# Altium PCB LMV324对射接收板_20260912.PcbDoc
Units mil, origin at the board's own origin, x right, y up, seen from the top; angles counter-clockwise.
Board outline 358.27 x 1118.11 mil, 2 copper layers (Top, Bottom), stack 12.7 mil thick; 60 components, 35 nets, 153 pads, 63 vias.
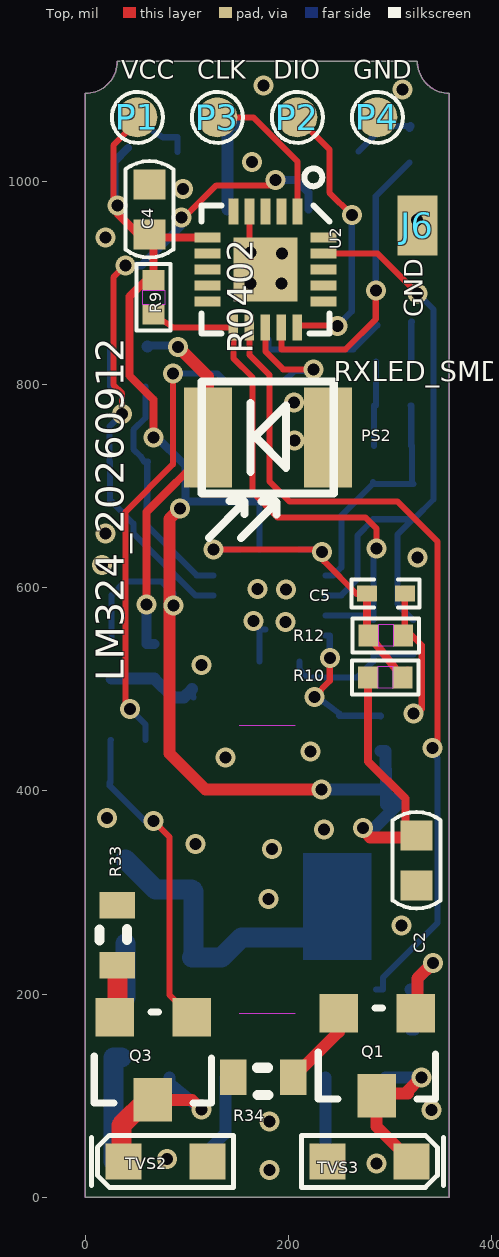
[diagram p0: Top view]
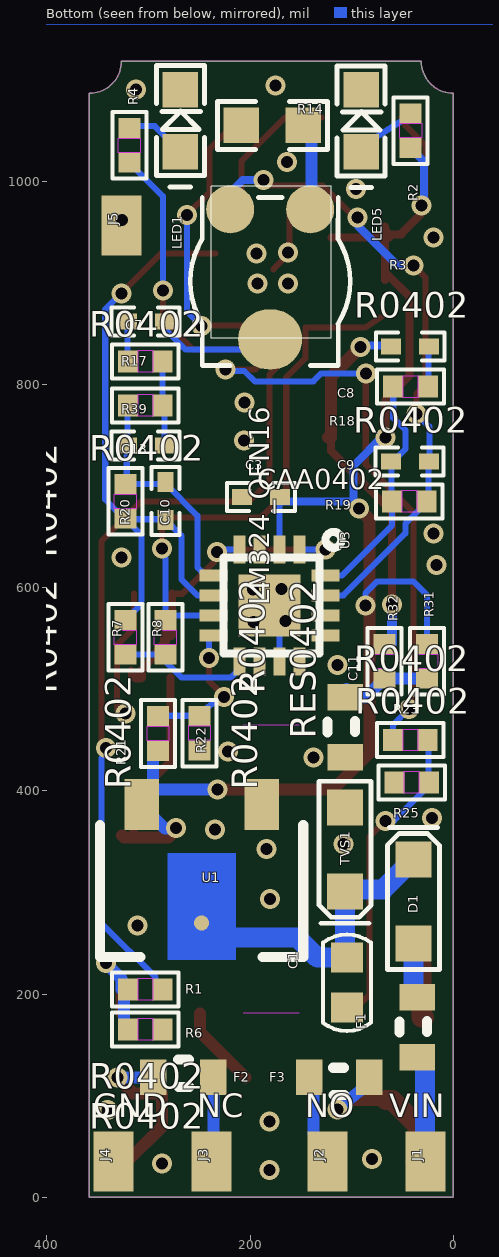
[diagram p1: Bottom view, seen from below]

## Layer stack, top to bottom
Solder Mask Top: solder mask 0.4, Solder Resist, Dk 3.5
Top: signal copper 1.35
Dielectric 1: dielectric 10, FR-4, Dk 4.3
Bottom: signal copper 1.35
Solder Mask Bottom: solder mask 0.4, Solder Resist, Dk 3.5

## Board outline
358.27,0 0,0 0,1086.61 ccw(c0,1118.11) 31.5,1118.11 326.77,1118.11 ccw(c358.27,1118.11) 358.27,1086.61

## Design rules (kind name [scope] priority, off if disabled: settings)
Clearance "Clearance - Default - DEFAULT- SMD" [IsVia vs IsSMTPin] p1: gap=6 ignorepadtopadclearanceinfootprint=FALSE
Clearance "Clearance - Default - DEFAULT - Via" [IsVia vs IsVia] p2: gap=6 ignorepadtopadclearanceinfootprint=FALSE
Clearance "Clearance - Default - DEFAULT - Net" [All] p3: gap=6 ignorepadtopadclearanceinfootprint=FALSE except(0: Arc-Hole Track-Hole SMDPad-Hole THPad-Hole Via-Hole Fill-Hole Poly-Hole Region-Hole Text-Hole; 10: Text-Text)
ComponentClearance "ComponentClearance - Default - DEFAULT" [All] p1: gap=6 collisioncheckmode=3 verticalgap=10 showdistances=FALSE
FanoutControl Fanout_Small [(CompPinCount < 5)] p3: bgadir=Out bgaviamode=Centered fanoutstyle=Auto fanoutdirection=OutThenIn viagrid=1 // Fanout_Small (Default Rule)
FanoutControl Fanout_SOIC [IsSOIC] p4: bgadir=Out bgaviamode=Centered fanoutstyle=Auto fanoutdirection=Alternating viagrid=1 // Fanout_SOIC (Default Rule)
HoleToHoleClearance "HoleToHoleClearance - Default - DEFAULT" [All] p1: gap=6 allowstackedmicrovias=TRUE
Length "Default Length" [All] p1: maxlimit=50000 minlimit=0
MaxMinImpedance "Default Impedance" [All] p1: minimum=50.00 maximum=150.0
ParallelSegment "Default Parallel Segment Adjasent" [All] p1: limit=1000 gap=200
ParallelSegment "Default Parallel Segment Same Layer" [All] p2: limit=1000 gap=200
PlaneConnect "Default PlaneConnect" [All] p1: planeconnectstyle=Direct reliefexpansion=20 reliefentries=4 reliefconductorwidth=15 reliefairgap=10
PolygonConnect "PolygonConnect - Default SMT" [IsSMTPin] p1: connectstyle=Direct reliefconductorwidth=10 reliefentries=4 polygonreliefangle="45 Angle" airgapwidth=10
PolygonConnect "PolygonConnect - Default Pad" [All] p2: connectstyle=Direct reliefconductorwidth=15 reliefentries=4 polygonreliefangle="45 Angle" airgapwidth=10
RoutingLayers "RoutingLayers - Default - DEFAULT" [All] p1: top layer_v5=TRUE bottom layer_v5=TRUE
RoutingPriority "RoutingPriority - Default - DEFAULT" [All] p1: routingpriority=3
RoutingTopology "Default Routing Topology" [All] p1: topology=Shortest
RoutingVias "RoutingVias - Default - DEFAULT" [All] p1: holewidth=11.81 width=19.68 viastyle="Through Hole" minholewidth=11.81 minwidth=19.68 maxholewidth=11.81 maxwidth=19.68
SMDToCorner "SMDToCorner - Default - DEFAULT" [All] p1: distance=60000
SolderMaskExpansion [All] p1: expansion=4 istentingtop=FALSE
Width "Default Width" [All] p1: maxlimit=6 minlimit=6 preferedwidth=6
22 further rules are at their usual default settings.

## Components (designator, comment, footprint, x,y, rotation, side; value= is the part's Value field where it differs from the comment)
C1 "C0603" C0603 104.74,211.26 r270 bottom
C2 "C0603" C0603 326.03,331.75 r270 top
C3 "CAA0402" CAA0402 153.54,704.72 r0 bottom
C4 "C0603" C0603 62.99,972.44 r270 top
C5 "CAA0402" CAA0402 259.84,578.74 r0 top
C7 "CC0402" CC0402 338.58,846.46 r180 bottom
C8 "CC0402" CC0402 6.74,853.05 r0 bottom
C9 "CC0402" CC0402 78.74,708.66 r180 bottom
C10 "CC0402" CC0402 267.72,649.61 r90 bottom
C11 "0603" 0603 106.3,433.07 r0 bottom
C13 "CC0402" CC0402 338.58,724.41 r180 bottom
D1 "WSOD-323" WSOD-323 39.37,291.34 r270 bottom
F1 "0603" 0603 35.43,137.8 r0 bottom
F2 "0603" 0603 295.28,118.11 r90 bottom
F3 "0603" 0603 82.68,118.11 r270 bottom
J1 "FPAD_3C" FPAD_3C 27.56,35.43 r90 bottom
J2 "FPAD_3C" FPAD_3C 124.02,35.43 r90 bottom
J3 "FPAD_3C" FPAD_3C 238.19,35.43 r90 bottom
J4 "FPAD_3C" FPAD_3C 334.65,35.43 r90 bottom
J5 "FPAD_3C" FPAD_3C 326.77,956.69 r90 bottom
J6 "FPAD_3C" FPAD_3C 326.77,956.69 r90 top
LED1 "LED0603" LED0603 243.7,1004.33 r90 bottom
LED5 "LED0603" LED0603 65.75,1003.94 r90 bottom
P1 "TEST-POINT_D1.0" TEST-POINT_D1.0 51.18,1062.99 r0 top
P2 "TEST-POINT_D1.0" TEST-POINT_D1.0 208.66,1062.99 r0 top
P3 "TEST-POINT_D1.0" TEST-POINT_D1.0 129.92,1062.99 r0 top
P4 "TEST-POINT_D1.0" TEST-POINT_D1.0 287.4,1062.99 r0 top
PS2 "RXLED_SMD" RXLED_SMD 179.53,748.03 r180 top
Q1 "SOT23$2F$2" SOT23$2F$2 326.77,181.1 r0 top
Q3 "SOT23$2F$2" SOT23$2F$2 106.3,177.17 r0 top
R1 "R0402" R0402 303.15,204.72 r180 bottom
R2 "R0402" R0402 42.1,1050 r90 bottom
R3 "SMD" SMD 180.31,901.57 r0 bottom
R4 "R0402" R0402 318.9,1035.43 r90 bottom
R6 "R0402" R0402 303.15,165.35 r180 bottom
R7 "R0402" R0402 322.83,551.18 r270 bottom
R8 "R0402" R0402 283.46,551.18 r90 bottom
R9 "R0402" R0402 67.24,885.83 r90 top
R10 "R0402" R0402 295.28,511.81 r180 top
R12 "R0402" R0402 295.79,553.17 r0 top
R14 "R0603" R0603 208.66,1055.12 r180 bottom
R17 "R0402" R0402 303.15,822.83 r180 bottom
R18 "R0402" R0402 42.17,797.93 r0 bottom
R19 "R0402" R0402 43.31,685.04 r0 bottom
R20 "R0402" R0402 322.83,685.04 r270 bottom
R21 "R0402" R0402 290.73,456.54 r90 bottom
R22 "R0402" R0402 249.92,457.02 r270 bottom
R23 "R0402" R0402 42.26,450.15 r0 bottom
R25 "R0402" R0402 41.05,408.44 r0 bottom
R31 "RES0402" RES0402 25.88,527.56 r90 bottom
R32 "RES0402" RES0402 67.9,527.56 r270 bottom
R33 "0603" 0603 31.5,228.35 r180 top
R34 "0603" 0603 204.72,118.11 r270 top
R39 "R0402" R0402 303.15,779.53 r0 bottom
TVS1 "SOD-323" SOD-323 106.54,342.54 r90 bottom
TVS2 "SOD-323" SOD-323 78.74,35.43 r0 top
TVS3 "SOD-323" SOD-323 279.53,35.43 r180 top
U1 "SOT89" SOT89 247.78,306.62 r0 bottom
U2 "MG32F003_QFN20" MG32F003_QFN20 177.17,913.39 r270 top
U3 "LM324_QFN16" LM324_QFN16 181.1,582.68 r270 bottom

## Footprints (in the part's own frame and the unit in brackets; to place one, negate y for a bottom-side part, rotate by r counter-clockwise, add the part's x,y. Pads: shape width x height; smd on the part's side, far side on the other; paste and mask are expansions set on the pad)
0603 [mil]
  rect 35x26 smd: 1(0,0) 2(0,-59)
  silkscreen extent -10,-36 18,-24
C0603 [mm]
  rect 0.75x0.8 smd: 1(-0.625,0) 2(0.625,0)
  silkscreen extent -1.21,-0.6 1.21,0.6
CAA0402 [mm]
  rect 0.5x0.4 smd: 1(0.435,0.391) 2(1.385,0.391)
  silkscreen extent 0.06,0.04 1.76,0.74
CC0402 [mm]
  rect 0.5x0.4 smd: 1(0.435,0.391) 2(1.385,0.391)
  silkscreen extent 0.06,0.04 1.76,0.74
FPAD_3C [mm]
  rect 1.5x1 smd: 1(0,0)
LED0603 [mil]
  rect 35x35 smd: 1(25,25) 2(86.02,25)
  silkscreen extent -10,1 110,49
LM324_QFN16 [mm]
  rect 0.7x0.3 smd: 1(-1.4,0.75) 2(-1.4,0.25) 3(-1.4,-0.25) 4(-1.4,-0.75) 9(1.4,-0.75) 10(1.4,-0.25) 11(1.4,0.25) 12(1.4,0.75)
  rect 0.3x0.7 smd: 5(-0.75,-1.4) 6(-0.25,-1.4) 7(0.25,-1.4) 8(0.75,-1.4) 13(0.75,1.4) 14(0.25,1.4) 15(-0.25,1.4) 16(-0.75,1.4)
  rrect0% 1.55x1.55 smd: 17(0,0)
  silkscreen extent -1.84,-1.15 1.21,1.8
MG32F003_QFN20 [mm]
  rect 0.65x0.25 smd: 1(-1.45,0.8) 2(-1.45,0.4) 3(-1.45,0) 4(-1.45,-0.4) 5(-1.45,-0.8)
  rect 0.25x0.65 smd: 6(-0.8,-1.45) 7(-0.4,-1.45) 8(0,-1.45) 9(0.4,-1.45) 10(0.8,-1.45) 16(0.8,1.45) 17(0.4,1.45) 18(0,1.45) 19(-0.4,1.45) 20(-0.8,1.45)
  rect 0.65x0.24 smd: 11(1.45,-0.8) 12(1.45,-0.4) 13(1.45,0) 14(1.45,0.4) 15(1.45,0.8)
  rrect0% 1.6x1.6 smd: 21(0,0)
  silkscreen extent -2.52,-1.6 1.6,1.6
R0402 [mm]
  rect 0.5x0.55 smd: 1(-0.432,0) 2(0.432,0)
  Top keep-out region: -0.18,0.274 0.182,0.274 0.182,-0.273 -0.18,-0.273 -0.18,0.274
  silkscreen extent -0.83,-0.43 0.83,0.43
R0603 [mil]
  rect 35x35 smd: 1(0,0) 2(61.02,0)
  silkscreen extent -24,-24 85,24
RES0402 [mm]
  rect 0.5x0.55 smd: 1(-0.432,0) 2(0.432,0)
  Top keep-out region: -0.18,0.274 0.182,0.274 0.182,-0.273 -0.18,-0.273 -0.18,0.274
  silkscreen extent -0.83,-0.43 0.83,0.43
RXLED_SMD [mm]
  rect 1.2x2.5 smd: 1(-1.5,0) 2(1.5,0)
  silkscreen extent -1.65,-1.4 1.65,2.52
SMD [mm]
  round 1.2 smd: 1(-1,-1.8) 3(1,-1.8)
  oval 1.6x1.5 smd: 2(0,1.45)
  round 0 all layers, no hole: $$$1(0,0)
  silkscreen extent -2,-2.1 2,2.1
SOD-323 [mm]
  round 0 all layers, no hole: 1(0,0)
  rect 0.9x0.9 smd: 2(-1.05,0) 3(1.05,0)
  silkscreen extent -1.85,-0.65 1.7,0.65
SOT23$2F$2 [mil]
  rect 38x38 smd: 1(-1.5,0) 2(-77.2,0)
  rect 38x43 smd: 3(-40,-81.1)
  silkscreen extent -98,-84 18,5
SOT89 [mil]
  rect 34x50 smd: 1(-59,-80) 3(59,-80)
  round 15 smd: 2(0,36.5)
  Top region: -17,-31.89 -17,-32 -33.5,-32 -33.5,73 33.5,73 33.5,-32 17,-32 17,-31.89 -17,-31.89
  silkscreen extent -100,-60 100,70
TEST-POINT_D1.0 [mm]
  round 1 smd: 1(0,0)
  silkscreen extent -0.64,-0.64 0.64,0.64
WSOD-323 [mm]
  rect 0.9x0.9 smd: 1(1.05,0) 2(-1.05,0)
  round 0 all layers, no hole: $$$1(0,0)
  silkscreen extent -1.85,-0.65 1.7,0.65

## Via types
v1: diameter 19.68, hole 11.81, Top to Bottom, 63 vias

## Nets (pads, with @x,y where several pads share a name; then routed paths per layer and width w, separated by ;. In a path a pad name is that pad's centre, name@x,y a point inside that pad or via, vN(x,y) a via of type N, cw(c..) or ccw(c..) an arc to the next point about the centre after c; other vN are vias at no path point)
$$$1: C8.1 R18.1 | length 41
  Bottom w6: C8.1 24.53,837.64 24.53,797.93 R18.1
$$$2: C7.1 R17.1 | length 40.3
  Bottom w6: R17.1 320.79,822.83 320.79,861.86 C7.1
$$$3: R3.1 R14.2 | length 91.9
  Bottom w11.81: R3.1 139.67,972.44 139.67,1055.12 R14.2
$$$12: Q3.1 R23.1 R25.1 | length 312.5
  Top w6: v1(66.93,370.47) 82.68,354.72 82.68,199.29 Q3.1
  Bottom w6: R23.1 24.65,450.15 24.65,408.44 R25.1 24.05,405.09 58.63,370.51 v1@66.9,370.51
$$$14: F3.1 Q3.3 TVS2.2 | length 175.8
  Top w11.81: Q3.3 104.72,96.07 v1(114.17,86.61)
  Top w19.68: TVS2.2 35.43,37.4 35.43,70.87 60.63,96.07 Q3.3
  Bottom w11.81: F3.1 82.68,112.3 v1(114.17,86.61)
$$$15: Q1.1 R1.1 R6.1 | length 143.7
  Top w11.81: Q1.1 326.77,181.1 326.77,215.35 v1(342.13,230.71)
  Bottom w11.81: R6.1 324.09,165.35 324.09,204.72 R1.1 326.77,204.72 326.77,215.35 v1(342.13,230.71)
$$$16: F2.1 Q1.3 TVS3.2 | length 172.3
  Top w11.81: TVS3.2 286.77,69.53 Q1.3 286.77,102.36 317.68,102.36 315.33,101.99 315.33,102.73 v1(330.71,118.11)
  Bottom w11.81: F2.1 v1(330.71,118.11)
$$$18: LED5.1 R2.2 | length 74.9
  Bottom w6: R2.2 42.1,1060.16 49.93,1060.16 76.25,1043.44 90.75,1043.44 LED5.1
$$$27: C13.2 R17.2 R39.1 | length 85.1
  Bottom w6: C13.2 284.27,739.81 284.27,779.53 R39.1 R17.2
$$$4871: D1.1 F1.2 | length 57.1
  Bottom w11.81: F1.2 F1.2@39.37,196.8
  Bottom w19.68: F1.2@39.37,196.8 D1.1
$$$4957: LED1.1 R4.2 | length 64.1
  Bottom w6: LED1.1 293.79,1054.42 R4.2@320.08,1054.42
  Bottom w7.87: R4.2 R4.2@320.08,1054.42
$$$12813: C11.2 R31.1 R32.2 | length 98.4
  Bottom w6: C11.2@105.11,500.21 C11.2
  Bottom w11.81: R31.1 R32.2 86.33,492.13 97.03,492.13 C11.2@105.11,500.21
$$$15607: C7.2 R3.2 | length 131.8
  Bottom w6: R3.2 180.31,834.65 263.78,834.65 287.52,858.38 C7.2
$$$30618: Q3.2 R33.1 | length 53.6
  Top w19.68: Q3.2 31.5,177.17 R33.1
$$$30627: Q1.2 R34.1 | length 81.6
  Top w11.81: R34.1 249.57,162.96 Q1.2
GND: C1.2 C2.2 C3.2 C4.1 C5.2 C11.1 J4.1 J5.1 J6.1 LED1.2 LED5.2 P4.1 PS2.1 R6.2 R12.2 R14.1 R22.2 R25.2 R33.2 R34.2 TVS1.1 TVS2.1 TVS3.1 U1.1 U2.4 U2.21 U3.11 U3.17 | length 233.1
  Top w6: U2.4 161.42,929.13 U2.21 ; C5.2 314.39,560.18 331.12,543.45 331.12,480.72 v1@322.83,472.44
  Bottom w6: U3.11 171.26,559.06 U3.17@177.17,559.06
  other v1: 181.1,26.77 286.61,33.46 80.31,37.8 181.1,74.8 340.55,86.22 311.02,267.72 180.31,293.7 183.86,342.91 108.27,347.64 234.65,362.2 21.26,373.23 137.8,433.07 221.65,438.98 322.83,476.38 114.17,524.02 196.85,566.54 165.35,567.32 169.29,598.82 197.24,598.43 16.54,622.44 326.77,629.92 19.69,653.54 205.91,744.88 205.51,782.28 162.6,899.61 192.91,899.61 162.6,929.92 193.7,929.13 19.69,944.88 326.38,961.81 96.06,992.52 163.78,1018.9 312.2,1090.55 175.2,1094.49
IN1-: C9.1 R18.2 R19.2 U3.16 | length 236.5
  Bottom w6: R18.2 59.17,767.24 47.24,755.31 47.24,736.45 54.76,728.94 58.02,724.06 C9.1 60.95,724.06 60.95,685.04 R19.2 60.31,661.42 109.52,612.2 U3.16
IN2+: C5.1 R10.1 R12.1 U3.1 U3.4 | length 365.9
  Top w6: v1(125.98,637.8) 126.97,638.78 130.51,638.78 131.5,637.8 v1@235.04,637.8 ; v1(232.68,635.43) 232.68,640.94 235.04,640.94 v1@235.04,637.8 ; C5.1 266.88,594.14 235.04,625.98 v1@235.04,637.8 ; R10.1 317.24,511.81 R10.1@317.24,519.64
  Top w7.87: C5.1 276.99,553.17 R12.1 ; R12.1@283.71,547.27 R10.1@307.35,517.72
  Top w9.84: R12.1 283.71,553.17 R12.1@283.71,547.27 ; R10.1@307.35,517.72 307.35,511.81 R10.1
  Bottom w6: v1(125.98,637.8) v1@127.17,637.8 ; v1@127.56,635.83 v1@127.17,637.8 ; U3.1 v1@127.17,637.8 ; U3.4 235.04,637.8 235.04,640.94 232.68,640.94 v1(232.68,635.43)
IN2-: C10.2 C13.1 R20.1 R39.2 U3.5 | length 238
  Bottom w6: U3.5 244.09,612.2 251.97,620.08 251.97,671.03 283.12,702.18 C10.2 283.12,702.27 322.83,702.27 R20.1 321.44,702.04 C13.1 320.79,739.81 320.79,779.53 R39.2
IN3+: R7.2 R8.1 U3.9 | length 136.5
  Bottom w6: U3.9 210.63,519.68 218.5,511.81 267.72,511.81 283.46,527.56 R8.1 R7.2
IN3-: R21.2 R22.1 U3.8 | length 145.1
  Top w6: v1(225.59,492.52) 225.2,492.91 240.55,508.27 v1(240.55,531.1)
  Bottom w6: v1(225.59,492.52) 225.59,492.13 229.12,492.13 249.92,476.3 R22.1 290.73,474.02 R21.2 ; U3.8 240.55,553.15 v1(240.55,531.1)
IO_OUTPUT_NC: R1.2 U2.12 | length 826.3
  Top w6: U2.12 161.42,829.25 181.1,809.57 181.1,704.72 200.79,685.04 307.09,685.04 346.46,645.67 346.46,448.82 340.75,443.11 v1(341.73,442.13)
  Bottom w6: R1.2 292.99,204.72 292.99,216.54 346.46,270 346.46,432.28 339.17,439.57 v1(341.73,442.13)
IO_OUTPUT_NO: R23.2 U2.13 | length 614.1
  Top w6: v1(43.7,480.71) 39.37,485.04 39.37,674.52 86.22,721.37 v1(86.22,811.02) ; U2.13 177.17,832.58 194.79,814.96 v1(224.41,814.96)
  Bottom w6: v1(43.7,480.71) 59.26,465.15 R23.2 ; v1(86.22,811.02) 129.92,811.02 137.8,803.15 195.43,803.15 205.57,813.29 224.41,813.29 v1(224.41,814.96)
OUT1: C9.2 R3.3 R19.1 U3.15 | length 635.7
  Top w6: v1(36.22,771.26) 36.22,791.34 27.56,800 27.56,905.51 v1(39.37,917.32) ; v1(94.49,964.57) 96,963.05 129.01,996.06 181.14,996.06 186.63,1001.55 v1(187.01,1001.18)
  Bottom w6: v1(36.22,771.26) 23.62,758.66 23.62,724.06 C9.2 24.43,724.06 24.43,685.04 R19.1 26.31,684.06 47.24,663.12 47.24,653.54 108.27,592.52 U3.15
  Bottom w7.87: v1(39.37,917.32) 55.12,917.32 94.49,956.69 v1(94.49,964.57) ; v1(187.01,1001.18) 207.48,1001.18 219.69,988.98 R3.3
OUT2: C10.1 R7.1 R20.2 U2.19 U3.6 | length 602.8
  Top w6: U2.19 287.4,929.13 v1(326.77,889.76)
  Bottom w6: U3.6 251.97,592.52 267.72,608.27 267.72,651.35 C10.1 283.12,667.39 322.83,667.39 R20.2 ; R7.1 307.09,583.93 307.09,652.29 R20.2 ; v1(326.77,889.76) 326.91,889.76 342.66,874.02 342.66,686.88 323.82,668.04 R20.2
OUT3: R8.2 R9.1 U2.11 U3.7 | length 540.7
  Top w6: R9.1 86.46,856.3 U2.11 145.67,825.93 164.51,807.09 164.51,693.76 188.98,669.29 275.59,669.29 286.61,658.27 v1(286.61,638.58) 286.42,638.39 v1@283.44,641.36
  Bottom w6: U3.7 278.83,572.83 283.46,568.2 283.46,629.92 291.34,637.8 286.61,638.19 v1(286.61,638.58)
OUT_NPN_NC: F2.2 J3.1 | length 84.6
  Bottom w11.81: F2.2 236.28,35.43 J3.1
OUT_NPN_NO: F3.2 J2.1 | length 92.3
  Bottom w11.81: J2.1 124.02,49.21 137.8,62.99 137.8,118.11 F3.2
RED: R4.1 U2.14 | length 294.8
  Top w6: U2.14 192.91,834.5 255.91,834.5 285.83,864.43 v1(285.83,892.52)
  Bottom w6: v1(285.83,892.52) 285.83,985.36 R4.1
SIGN: C8.2 PS2.2 R32.1 | length 374.1
  Top w7.87: v1(60.24,583.46) 60.24,674.52 120.47,734.76 PS2.2
  Top w11.81: v1(91.34,837.01) 120.47,807.87 PS2.2 PS2.2@123.57,748.03
  Bottom w6: C8.2@60.34,838.58 C8.2 ; v1(91.34,837.01) v1@91.34,838.58
  Bottom w7.87: C8.2@60.34,838.58 v1@91.34,838.58
  Bottom w9.84: v1(60.24,583.46) 60.24,544.56 R32.1
SWCLK: P3.1 U2.1 | length 145.9
  Top w6: P3.1 165.35,1062.99 208.66,1019.68 U2.1
SWDIO: P2.1 U2.15 | length 274.5
  Top w6: U2.15 208.66,858.27 236.22,858.27 v1(248.03,857.87) ; P2.1 240.16,1031.5 240.16,988.98 v1(262.2,966.93)
  Bottom w6: v1(248.03,857.87) 262.2,872.05 v1(262.2,966.93)
VC: C1.1 D1.2 TVS1.2 U1.2 | length 303.5
  Bottom w19.68: D1.2 68.9,303.15 104.59,303.15 TVS1.2 106.54,237.67 C1.1 133.86,235.87 153.9,255.91 233.57,255.91 U1.2
VCC: C2.1 C3.1 C4.2 P1.1 R2.1 R9.2 R10.2 R21.1 R31.2 U1.3 U2.6 U3.2 | length 1723.4
  Top w6: v1@31.5,968.5 v1(31.5,976.38) 27.56,976.38 27.56,1035.43 47.24,1055.12 P1.1 ; C4.2 C4.2@67.24,955.71
  Top w7.87: v1@31.5,968.5 51.18,948.82 51.18,947.83 C4.2 62.99,944.79 120.08,944.79 U2.6 ; v1(66.93,748.03) 66.93,785.08 43.31,808.7 43.31,886.56 66.26,909.51 R9.2 C4.2@67.24,955.71 ; R10.2 278.28,429.13 314.96,392.45 314.96,356.36 C2.1
  Top w11.81: v1(86.61,582.68) v1@82.68,578.74 ; v1(92.91,677.95) 82.68,667.72 v1@82.68,578.74 ; v1(232.28,401.57) 118.11,401.57 82.68,437.01 v1@82.68,578.74 ; v1(273.23,363.78) 272.05,362.6 280.31,354.33 324,354.33 C2.1
  Bottom w6: R31.2 25.88,592.81 39.37,606.3 74.8,606.3 86.61,594.49 v1(86.61,582.68) ; C3.1 171.26,689.32 U3.2
  Bottom w7.87: v1(31.5,976.38) 31.5,977.6 28.79,980.31 28.79,1019.68 R2.1 ; v1(66.93,748.03) 68.69,749.79 98.43,720.06 v1@98.43,685.04 ; v1(92.91,677.95) 96.85,677.17 v1@98.43,685.04 ; C3.1 170.69,685.04 v1@98.43,685.04
  Bottom w11.81: v1(232.28,401.57) 291.83,401.57 U1.3 ; v1(273.23,363.78) 273.23,362.99 283.95,362.99 306.78,385.83 U1.3 ; R21.1 295.64,439.54 295.69,405.72 295.69,386.62 U1.3
VIN: F1.1 J1.1 | length 110.2
  Bottom w19.68: J1.1 27.78,35.43 27.78,137.8 F1.1
pads on no net: D1.$$$1 R3.$$$1 TVS1.3 TVS2.3 TVS3.3 U2.2 U2.3 U2.5 U2.7 U2.8 U2.9 U2.10 U2.16 U2.17 U2.18 U2.20 U3.3 U3.10 U3.12 U3.13 U3.14

## Polygon pours and split planes (outlines as drawn)
GND on Bottom "Bottom-GND" (solid, remove dead copper, shelved, pour order 0): -154.72,1153.94 501.18,1153.94 501.18,-57.48 -154.72,-57.48
GND on Top "Top-GND" (solid, remove dead copper, shelved, pour order 1): -120.08,1161.81 535.83,1161.81 535.83,-49.61 -120.08,-49.61

## Keep-outs
Keep-Out Layer:
  lines w1: 151.57,181.1 206.69,181.1 ; 151.57,464.57 206.69,464.57 ; 0,0 0,1086.61 ccw(c0,1118.11) 31.5,1118.11 326.77,1118.11 ccw(c358.27,1118.11) 358.27,1086.61 358.27,0 0,0

## Other copper
Multi-Layer:
  circle w1: c15079.13,6090.55 r0.8
  circle w1: c12879.13,6890.55 r0.8
  circle w1: c12879.13,6883.35 r0.8
  circle w1: c15079.13,6083.35 r0.8
  lines w1: 12874.58,6877.75 12874.58,6905.35 ccw(c12874.58,6906.15) 12875.38,6906.15 12882.88,6906.15 ccw(c12883.68,6906.15) 12883.68,6905.35 12883.68,6877.75 12874.58,6877.75 ; 12877.38,6885.35 12877.38,6888.15 12880.88,6888.15 12880.88,6885.35 12877.38,6885.35 ; 15074.58,6077.75 15074.58,6105.35 ccw(c15074.58,6106.15) 15075.38,6106.15 15082.88,6106.15 ccw(c15083.68,6106.15) 15083.68,6105.35 15083.68,6077.75 15074.58,6077.75 ; 15077.38,6085.35 15077.38,6088.15 15080.88,6088.15 15080.88,6085.35 15077.38,6085.35

## Silkscreen, mask and mechanical layers (free items; w line width, h text height)
Silkscreen Top:
  text "VCC" at 35.43,1094.49 h31.5
  text "CLK" at 110.24,1094.49 h31.5
  text "DIO" at 185.04,1094.49 h31.5
  text "GND" at 263.78,1094.49 h31.5
  text "GND" at 338.58,866.14 h31.5 r90
  text "LM324_20260912" at 47.24,507.87 h47.24 r90
Silkscreen Bottom:
  lines w1: 120.08,845.67 238.19,845.67 238.19,995.28 120.08,995.28 120.08,845.67
  text "VIN" at 62.99,70.87 h39.37
  text "NO" at 145.67,70.87 h39.37
  text "NC" at 251.97,70.87 h39.37
  text "GND" at 354.33,70.87 h39.37
Drill Drawing:
  lines w1: 337.36,789.02 337.39,789.02 ; 257.74,1118.34 257.77,1118.34
  lines w10: 307.74,1118.34 750,1118.34 ; 387.36,789.02 750,789.02 ; 700,639.02 700,789.02 ; 700,1268.34 700,1118.34 ; 700,789.02 675,689.02 725,689.02 700,789.02 ; 700,1118.34 725,1218.34 675,1218.34 700,1118.34
  text "8.4mm" at 408.64,1230.84 h50